# EAGLE board circuit-diagram (EAGLE 9.6.2)

Size 48.26 x 58.42 mm. Coordinates in mm from the lower left corner, seen from the top.
Outline: 0,58.42 48.26,58.42 48.26,0 0,0 0,58.42
Copper layers (1*16): Top 0.035mm / dielectric 1.5mm / Bottom 0.035mm
Design rules "default": minimum track width 6mil, minimum drill 0.35mm, track to track 6mil, track to pad 6mil, pad to pad 6mil, via to via 6mil, smd to smd 6mil, copper to edge 40mil, drill to drill 6mil, minimum pad ring 10mil, minimum via ring 8mil, stop-mask expansion 4mil, vias tented up to drill 0mil, thermal gap 10mil

## Footprints (pad centres in the part's own frame; a part is rotated, then mirrored left to right if it is on the bottom)
CPOL-RADIAL-5MM-10MM = drill 0.9 pad 1.93 square: + 2.5,0 | drill 0.9 pad 1.93: - -2.5,0
DO41-10 = drill 1.118: A 5.08,0; C -5.08,0
TO220H = drill 1.118 long: 1 -2.54,-10.16; 2 0,-10.16; 3 2.54,-10.16 | hole 3.302: 0,4.826
POWER_JACK_PTH_BREAD = drill 1.3: GND 0,7.9; GNDBREAK 4.8,10.7; PWR 0,13.7
LED5MM = drill 0.813 pad 1.676 octagon: A -1.27,0; K 1.27,0
AXIAL-0.3 = drill 0.9 pad 1.88: P$1 -3.81,0; P$2 3.81,0
02P = drill 0.914 long: 1 -1.27,0; 2 1.27,0

## Placement (x,y rotation side)
C1  1mF  [CPOL-RADIAL-5MM-10MM]  40.64,33.02 0 top
D1  1N4004  [DO41-10]  17.78,30.48 0 top
D2  1N4004  [DO41-10]  40.64,43.18 0 top
D3  1N4004  [DO41-10]  27.94,43.18 0 top
D4  1N4004  [DO41-10]  40.64,50.8 0 top
IC1  7805T  [TO220H]  38.1,17.78 0 top
J1  POWER_JACKPTH_BREAD  [POWER_JACK_PTH_BREAD]  19.05,16.51 90 top
LED1  [LED5MM]  25.4,50.8 0 top
R1  [AXIAL-0.3]  16.51,49.53 0 top
SL1  [02P]  6.35,6.35 90 top
SL2  [02P]  22.86,6.35 270 top

## Library data of the parts
C1 = SparkFun-Capacitors; PROD_ID: CAP-09538
D1-D4 = diode
IC1 LED1 = adafruit
J1 = SparkFun-Connectors; PROD_ID: PRT-10811
R1 = SparkFun-Resistors
SL1 SL2 = con-amp-quick; OC_FARNELL: unknown; OC_NEWARK: unknown

## Nets
N$1: D1.A D3.C J1.GND SL1.2
N$2: C1.+ D1.C D2.C IC1.1
N$3: D2.A D4.C J1.PWR SL1.1
N$4: C1.- D3.A D4.A IC1.2 LED1.K SL2.2
N$5: IC1.3 R1.P$2 SL2.1
N$6: LED1.A R1.P$1

## Tracks (layer width: path | path; a pad name or v marks a point on that pad's centre or on a via)
N$1  (3 unrouted)
N$2  (3 unrouted)
N$3  (3 unrouted)
N$4  (5 unrouted)
N$5  (2 unrouted)
N$6  (1 unrouted)